# Altium PCB ESP32_With_USB-C_Port_AL.PcbDoc (part 1 of 2)
Units mil, origin at the board's own origin, x right, y up, seen from the top; angles counter-clockwise.
Board outline 2700 x 1000 mil, 4 copper layers (L1, L2, L3, L4), stack 61.583 mil thick; 64 components, 73 nets, 299 pads, 163 vias.
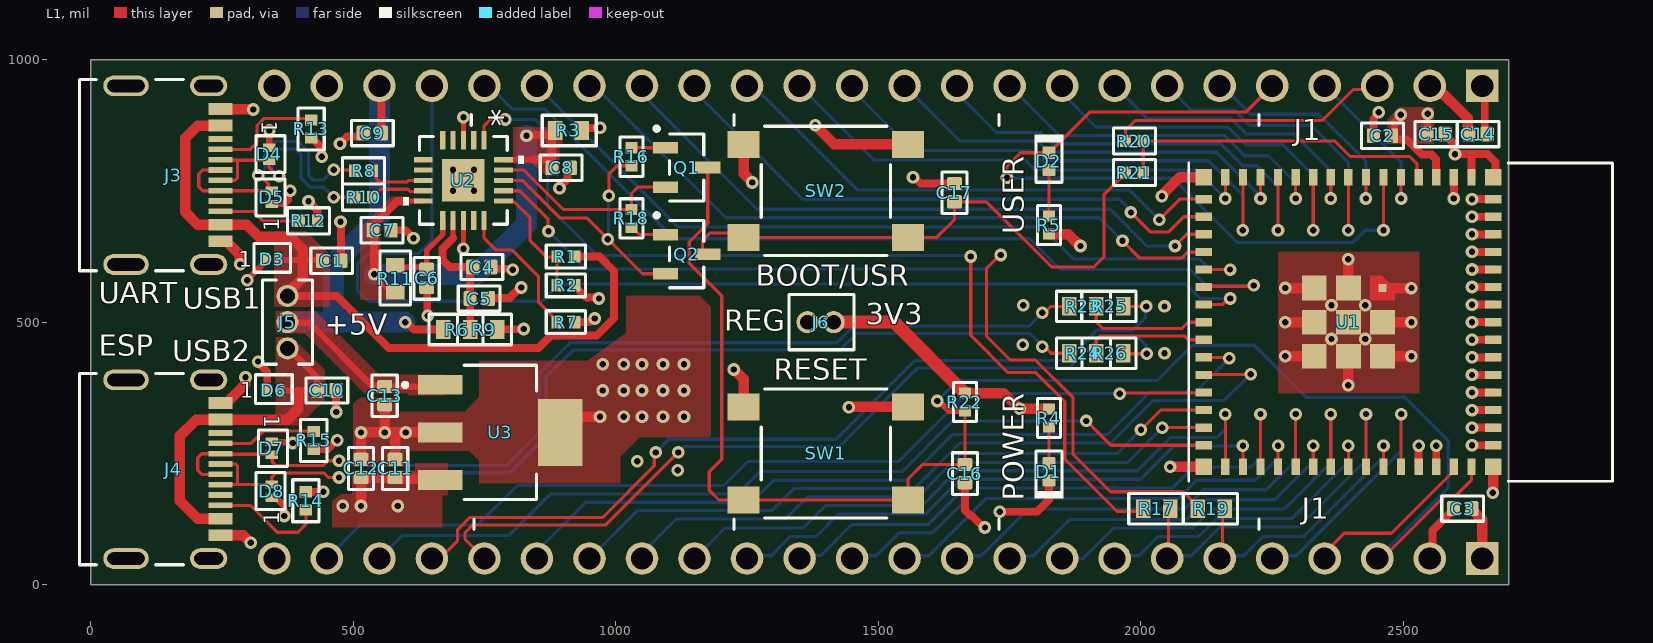
[diagram p0: L1 view]
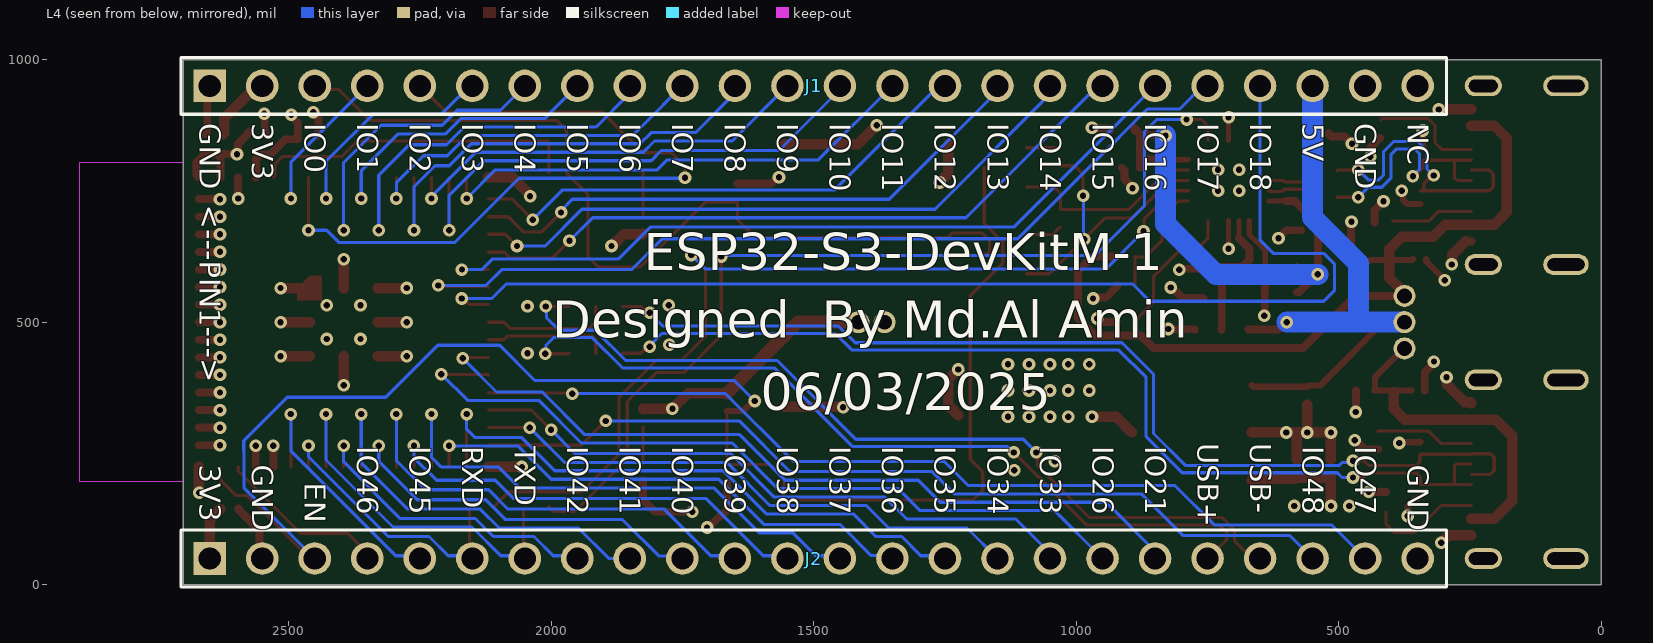
[diagram p1: L4 view, seen from below]
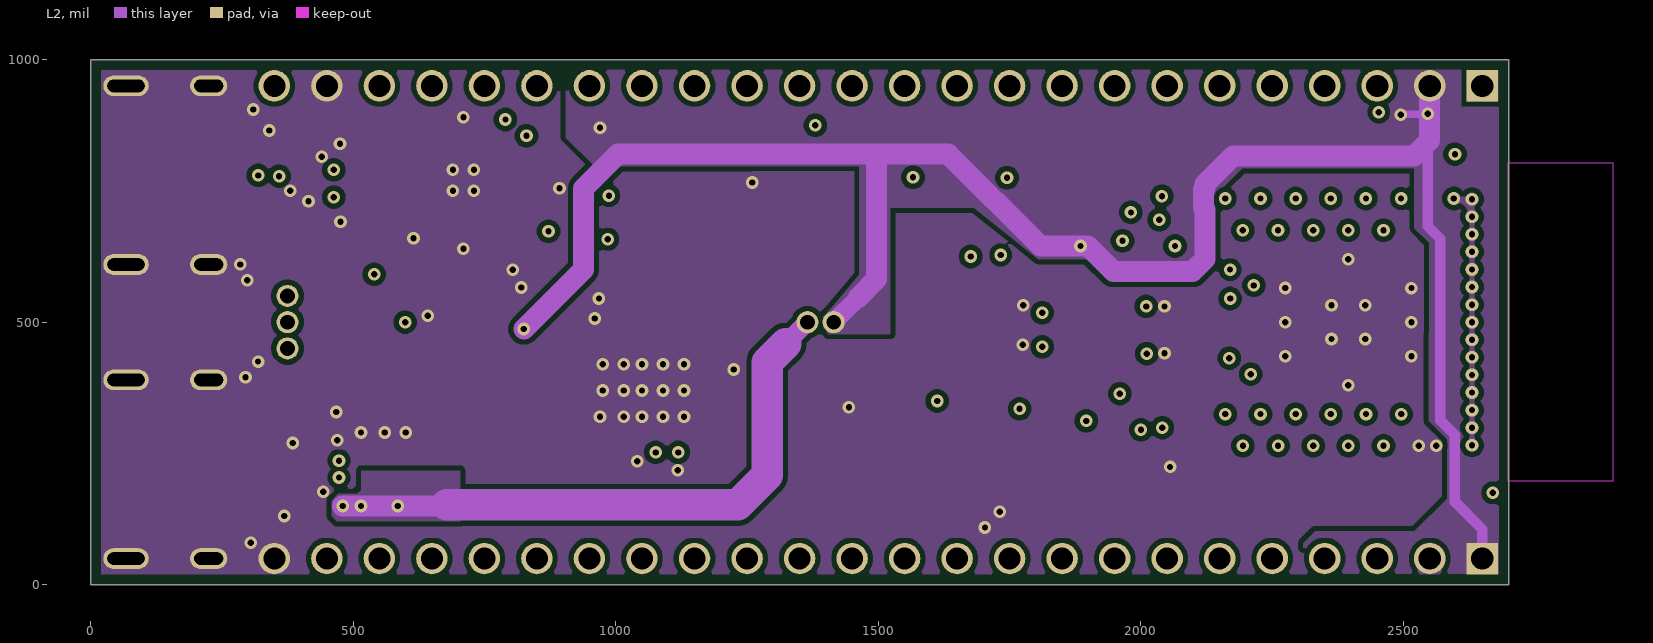
[diagram p2: L2]
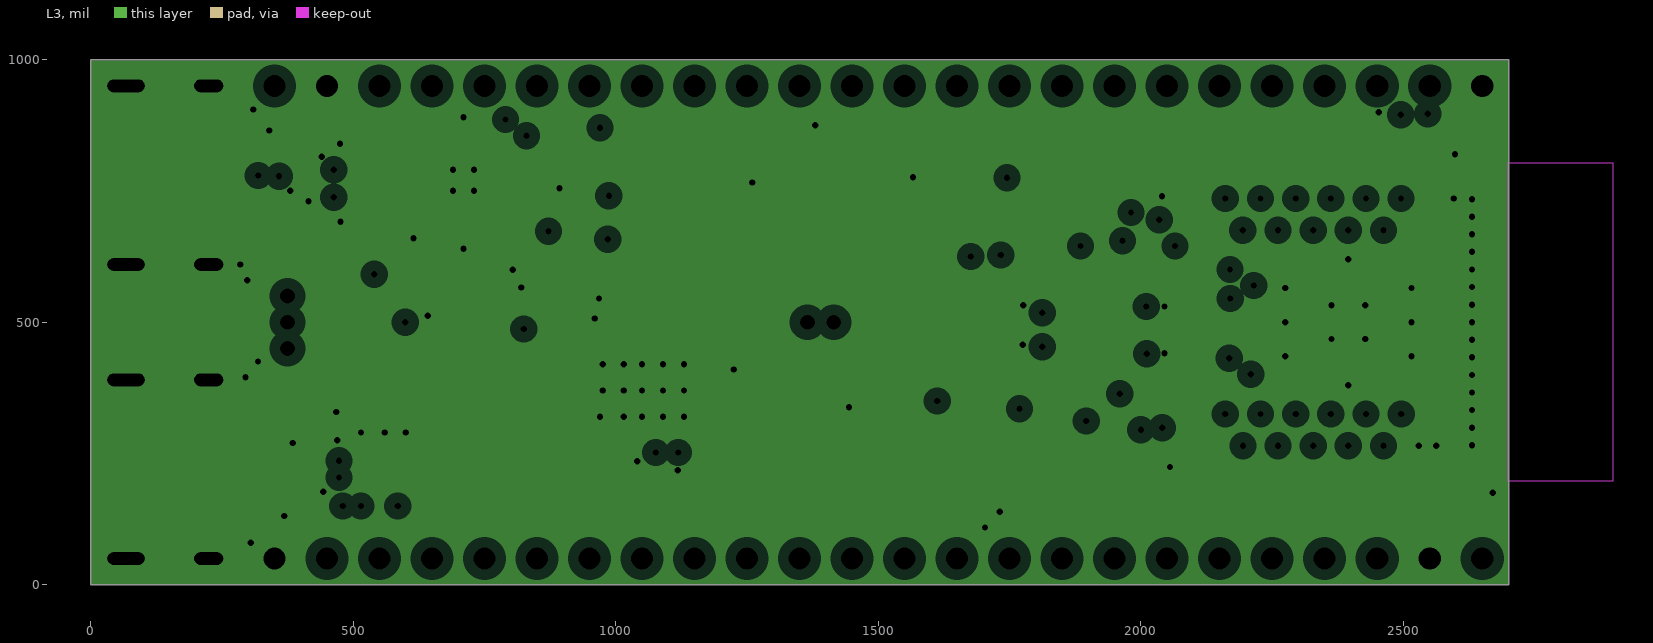
[diagram p3: L3, clearances drawn from the general rule]
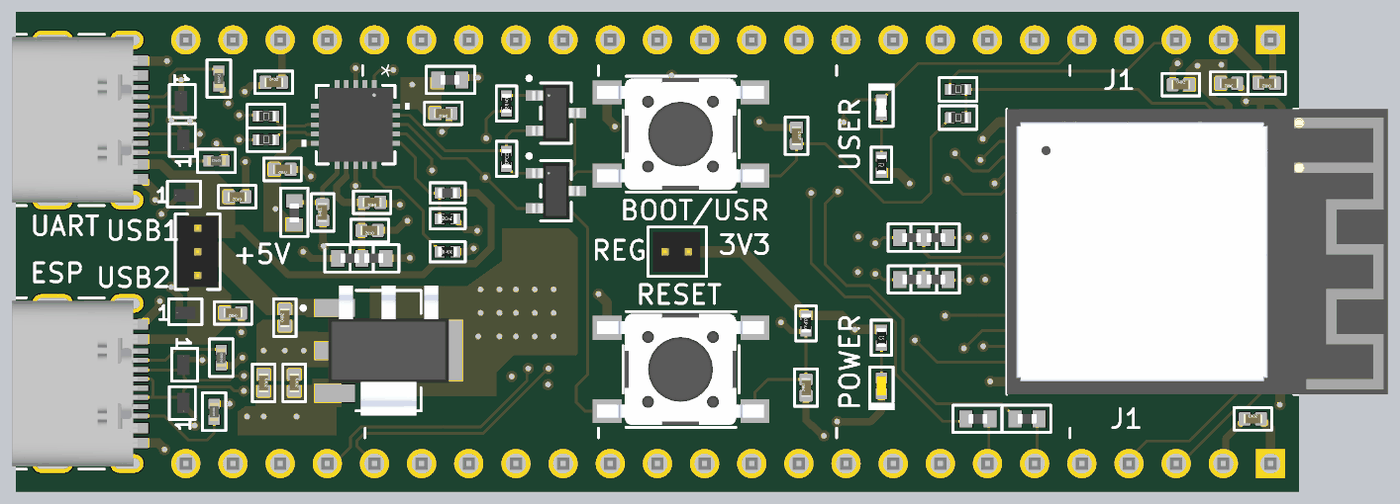
[diagram p4: 3D render of the assembled board from above, using the file's embedded part models]

## Layer stack, top to bottom
Top Solder: solder mask 0.4, Solder Resist, Dk 3.5
L1: signal copper 1.378
Dielectric 2: prepreg 3.9134, PP-006, Dk 4.1
L2: signal copper 0.5984
Dielectric 1: dielectric 49.8031, FR-4, Dk 4.8
L3: plane copper 0.5984, net GND
Dielectric 3: prepreg 3.9134, PP-006, Dk 4.1
L4: signal copper 1.378
Bottom Solder: solder mask 0.4, Solder Resist, Dk 3.5

## Board outline
0,0 2700,0 2700,1000 0,1000

## Design rules (kind name [scope] priority, off if disabled: settings)
Clearance Smaller [(Layer = 'L2')] p1: gap=10 ignorepadtopadclearanceinfootprint=FALSE
Clearance [All] p2: gap=6 ignorepadtopadclearanceinfootprint=FALSE
Clearance "DIFF90 Clearance" [InDifferentialPairClass('DIFF90')] p3: gap=8 ignorepadtopadclearanceinfootprint=FALSE
DiffPairsRouting DIFF90 [InDifferentialPairClass('DIFF90')] p1: maxlimit=8.1 minlimit=8 mostfreqgap=8 toplayer_minwidth=6.03 toplayer_maxwidth=6.23 toplayer_prefwidth=6.03 midlayer1_minwidth=5.1 midlayer1_maxwidth=5.2 midlayer1_prefwidth=5.1 bottomlayer_minwidth=6.03 bottomlayer_maxwidth=6.23 bottomlayer_prefwidth=6.03 maxuncoupledlength=500
MinimumSolderMaskSliver [All] p1: minsoldermaskwidth=3.15
PlaneClearance [All] p1: clearance=20
PlaneConnect [All] p1: pad.planeconnectstyle=Relief pad.reliefexpansion=20 pad.reliefentries=4 pad.reliefconductorwidth=20 pad.reliefairgap=10 via.planeconnectstyle=Direct via.reliefexpansion=20 via.reliefentries=4 via.reliefconductorwidth=10 via.reliefairgap=10
PolygonConnect [All] p1: connectstyle=Direct reliefconductorwidth=10 reliefentries=4 polygonreliefangle="90 Angle" airgapwidth=10
RoutingVias [All] p1: holewidth=12 width=24 viastyle="Through Hole" minholewidth=12 minwidth=24 maxholewidth=12 maxwidth=24
SilkToSolderMaskClearance [IsPad] p1: minsilkscreentomaskgap=6 clearancetoexposedcopper=TRUE
SolderMaskExpansion [All] p1: expansion=2 istentingtop=FALSE
SupplyNets "Schematic Supply Nets_5" [InNet('GND')] p1: voltage=0.000
SupplyNets "Schematic Supply Nets_4" [InNet('+3V3_REG')] p2: voltage=0.000
SupplyNets "Schematic Supply Nets_3" [InNet('+5V_VBUS2')] p3: voltage=0.000
SupplyNets "Schematic Supply Nets_2" [InNet('+5V')] p4: voltage=0.000
SupplyNets "Schematic Supply Nets_1" [InNet('+3V3')] p5: voltage=0.000
SupplyNets "Schematic Supply Nets" [InNet('+5V_VBUS1')] p6: voltage=0.000
Width [All] p1: maxlimit=100 minlimit=6 preferedwidth=10 minimp=50.000000 maximp=50.000000 favimp=50.000000
25 further rules are at their usual default settings.

## Classes and differential pairs
differential pair class DIFF90: CON1_USB CON2_USB CON_ESP_USB ESP_USB FTDI_USB
differential pair FTDI_USB: +FTDI_USB_P -FTDI_USB_N
differential pair ESP_USB: +ESP_USB_P -ESP_USB_N
differential pair CON_ESP_USB: +CON_ESP_USB_P -CON_ESP_USB_N
differential pair CON2_USB: +CON2_USB_P -CON2_USB_N
differential pair CON1_USB: +CON1_USB_P -CON1_USB_N

## Components (designator, comment, footprint, x,y, rotation, side; value= is the part's Value field where it differs from the comment)
C1 "100nF , 50V" CAPC1005X70N_ALL 459,617 r180 top value=100nF
C2 "100nF , 50V" CAPC1005X70N_ALL 2460,855 r0 top value=100nF
C3 "100nF , 50V" CAPC1005X70N_ALL 2612.68,145 r0 top value=100nF
C4 "100nF , 50V" CAPC1005X70N_ALL 745,605 r180 top value=100nF
C5 "4u7, 16V" CAPC1005X70N_ALL 740,545 r180 top value=4.7uF
C6 "100nF , 50V" CAPC1005X70N_ALL 640,583.5 r90 top value=100nF
C7 "100nF , 50V" CAPC1005X70N_ALL 555,675 r180 top value=100nF
C8 "100nF , 50V" CAPC1005X70N_ALL 896,794 r180 top value=100nF
C9 "100nF , 50V" CAPC1005X70N_ALL 536.5,860 r0 top value=100nF
C10 "100nF , 50V" CAPC1005X70N_ALL 450,370 r180 top value=100nF
C11 "10uF, 10V" CAPC1005X70N_ALL 580,221.5 r270 top value=10uF
C12 "10uF, 10V" CAPC1005X70N_ALL 515,221.5 r270 top value=10uF
C13 "4u7, 16V" CAPC1005X70N_ALL 560,360 r90 top value=4.7uF
C14 "10uF, 10V" CAPC1005X70N_ALL 2642,858 r180 top value=10uF
C15 "100nF , 50V" CAPC1005X70N_ALL 2562,858 r180 top value=100nF
C16 "1uF, 35V" CAPC1005X70N_ALL 1665,211.5 r90 top value=10uF
C17 "100nF , 50V" CAPC1005X70N_ALL 1645,746.5 r270 top value=100nF
D1 "LED_YLW-GRN" LED_0402_YLW_GR 1825,215 r90 top
D2 "RED_LED" "LED_0402_RED_01- DUPLICATE" 1825,806.34 r270 top
D3 "AQ3045-01ETG" RTVS_SOD882_LTF-M 346,620 r0 top
D4 "AQ3045-01ETG" RTVS_SOD882_LTF-M 340,820 r270 top
D5 "AQ3045-01ETG" RTVS_SOD882_LTF-M 345,737.5 r90 top
D6 "AQ3045-01ETG" RTVS_SOD882_LTF-M 349,370 r0 top
D7 "AQ3045-01ETG" RTVS_SOD882_LTF-M 345,260 r270 top
D8 "AQ3045-01ETG" RTVS_SOD882_LTF-M 345,178.5 r90 top
J1 "22-28-4245" CONN_SD-42375-001_M295_24_MOL 2650,950 r0 bottom locked
J2 "22-28-4245" CONN_SD-42375-001_M295_24_MOL 2650,50 r0 bottom locked
J3 "217179-0001" MOLEX_2171790001 112.8,779.92 r270 top locked
J4 "217179-0001" MOLEX_2171790001 112.8,220.08 r270 top locked
J5 "FTS-103-01-F-S" CONN_FTS-103-01-x-S_SAI 375,550 r90 top locked
J6 "FTS-102-01-F-S" CONN_FTS-102-01-x-S_SAI 1365,500 r180 top
Q1 "SS8050-G" TRAN_SS8050-G_CIP 1135,794.5 r270 top
Q2 "SS8050-G" TRAN_SS8050-G_CIP 1135,629.5 r270 top
R1 "4K7" RESC1005X40N 905,625 r0 top value=4.7kR
R2 "10K" RESC1005X37N_10k 905,570 r180 top value=10kR
R3 "0R" RESC1005X40_0 910,865 r0 top value=0mR
R4 "1K" RESC1005X40N_1k 1825,317.5 r90 top value=1kR
R5 "1K" RESC1005X40N_1k 1825,685 r270 top value=1kR
R6 "0R" RESC1005X40_0 697.59,486 r180 top value=0mR
R7 "10K" RESC1005X37N_10k 905,500 r0 top value=10kR
R8 "27R" RESC1005X40N_27 520,788 r0 top
R9 "0R" RESC1005X40_0 748.77,486 r0 top value=0mR
R10 "27R" RESC1005X40N_27 520,738 r0 top
R11 "0R" RESC1005X40_0 580,582.5 r90 top value=0mR
R12 "5K1" RESC1005X37N_5.1 415,693 r180 top value=5.1kR
R13 "5K1" RESC1005X37N_5.1 420,867.99 r90 top value=5.1kR
R14 "5K1" RESC1005X37N_5.1 410,160 r270 top value=5.1kR
R15 "5K1" RESC1005X37N_5.1 425,275 r90 top value=5.1kR
R16 "10K" RESC1005X37N_10k 1030,815 r270 top value=10kR
R17 "0R" RESC1005X40_0 2030,145 r180 top value=0mR
R18 "10K" RESC1005X37N_10k 1030,697.5 r90 top value=10kR
R19 "0R" RESC1005X40_0 2134,145 r180 top value=0mR
R20 "27R" RESC1005X40N_27 1987.5,845 r0 top
R21 "27R" RESC1005X40N_27 1987.5,785 r0 top
R22 "10K" RESC1005X37N_10k 1665,348 r90 top value=10kR
R23 "0R" RESC1005X40_0 1889.23,530 r0 top value=0mR
R24 "0R" RESC1005X40_0 1889.41,441 r0 top value=0mR
R25 "0R" RESC1005X40_0 1940.41,530 r180 top value=0mR
R26 "0R" RESC1005X40_0 1940.59,441 r180 top value=0mR
SW1 "PTS645SH50SMTR92LFS" PTS645S_SMTR92_CNK 1400,250 r180 top locked
SW2 "PTS645SH50SMTR92LFS" PTS645S_SMTR92_CNK 1400,750 r180 top locked
U1 "ESP32-S3-MINI-1-N8" XCVR_ESP32-S3-MINI-1-N8 2395.04,500 r270 top locked
U2 "FT231XQ-R" QFN20_FT231XQ_FTD-M 710,770 r270 top locked
U3 "TL1963A-33DCYR" VREG_TL1963A-33DCYR 780,290 r0 top locked

## Footprints (in the part's own frame and the unit in brackets; to place one, negate y for a bottom-side part, rotate by r counter-clockwise, add the part's x,y. Pads: shape width x height; smd on the part's side, far side on the other; paste and mask are expansions set on the pad)
CAPC1005X70N_ALL [mm]
  rrect25% 0.64x0.72 smd: 1(-0.44,0) 2(0.44,0)
  silkscreen extent -1.01,-0.61 1.01,0.61, body extent -0.51,-0.25 0.51,0.25, height 0.65
CONN_FTS-102-01-x-S_SAI [mil]
  round 42 hole 28 paste-99999 mask+0: 1(0,0) 2(-50,0)
  silkscreen extent -89,-53 35,53, body extent -76,-43 24,42, height 154
CONN_FTS-103-01-x-S_SAI [mil]
  round 42 hole 28 paste-99999 mask+0: 1(0,0) 2(-50,0) 3(-100,0)
  silkscreen extent -130,-48 30,48, body extent -125,-43 25,42, height 154
CONN_SD-42375-001_M295_24_MOL [mil]
  rect 62x62 / inner rect 60x60 / far side rect 62x62 hole 42 paste-99999 mask+0: 1(0,0)
  round 62 / inner round 60 / far side round 62 hole 42 paste-99999 mask+0: 2(-100,0) 3(-200,0) 4(-300,0) 5(-400,0) 6(-500,0) 7(-600,0) 8(-700,0) 9(-800,0) 10(-900,0) 11(-1000,0) 12(-1100,0) 13(-1200,0) 14(-1300,0) 15(-1400,0) 16(-1500,0) 17(-1600,0) 18(-1700,0) 19(-1800,0) 20(-1900,0) 21(-2000,0) 22(-2100,0) 23(-2200,0) 24(-2300,0)
  silkscreen extent -2355,-54 55,54, body extent -2350,-49 50,49, height 385
"LED_0402_RED_01- DUPLICATE" [mm]
  rrect15% 0.59x0.61 smd: 1(-0.415,0) 2(0.415,0)
  silkscreen extent -1.3,-0.71 1.02,0.71, body extent -0.5,-0.25 0.5,0.25, height 0.35
LED_0402_YLW_GR [mm]
  rrect15% 0.59x0.61 smd: 1(-0.415,0) 2(0.415,0)
  silkscreen extent -1.3,-0.71 1.02,0.71, body extent -0.5,-0.25 0.5,0.25, height 0.32
MOLEX_2171790001 [mm]
  rect 0.565x1.15 smd mask+0.064: A1B12(-3.2,3.425) A4B9(-2.4,3.425) B1A12(3.2,3.425) B4A9(2.4,3.425)
  rect 0.273x1.15 smd mask+0.064: A5(-1.25,3.425) A6(-0.25,3.425) A7(0.25,3.425) A8(1.25,3.425) B5(1.75,3.425) B6(0.75,3.425) B7(-0.75,3.425) B8(-1.75,3.425)
  oval 1x1.8 hole 0.6 slot 1.4 at 90 deg mask+0.064: S1(-4.32,2.85) S2(4.32,2.85)
  oval 1x2.2 hole 0.6 slot 1.8 at 90 deg mask+0.064: S3(-4.32,-1.15) S4(4.32,-1.15)
  silkscreen extent -4.62,-3.4 4.62,1.63, body extent -4.47,-3.32 4.47,3.43, height 3.26
PTS645S_SMTR92_CNK [mil]
  rect 61x51 smd paste+0 mask+0: 1(-156.5,88.58) 2(156.5,88.58) 3(-156.5,-88.58) 4(156.5,-88.58)
  silkscreen extent -123,-123 123,123, body extent -176,-118 178,118, height 197
QFN20_FT231XQ_FTD-M [mil]
  rect 36x10 smd paste+0 mask+0: 1(-76.5,39.37) 2(-76.5,19.68) 3(-76.5,0) 4(-76.5,-19.68) 5(-76.5,-39.37) 11(76.5,-39.37) 12(76.5,-19.68) 13(76.5,0) 14(76.5,19.68) 15(76.5,39.37)
  rect 10x36 smd paste+0 mask+0: 6(-39.37,-76.5) 7(-19.68,-76.5) 8(0,-76.5) 9(19.68,-76.5) 10(39.37,-76.5) 16(39.37,76.5) 17(19.68,76.5) 18(0,76.5) 19(-19.68,76.5) 20(-39.37,76.5)
  rect 81x81 smd paste+0 mask+0: 21(0,0)
  silkscreen extent -84,-114 84,114, body extent -79,-79 79,79, height 32
RESC1005X37N_5.1 [mm]
  rect 0.54x0.6 smd: 1(-0.432,0) 2(0.432,0)
  silkscreen extent -1.02,-0.64 1.02,0.64, body extent -0.5,-0.25 0.5,0.25, height 0.33
RESC1005X37N_10k [mm]
  rect 0.54x0.6 smd: 1(-0.432,0) 2(0.432,0)
  silkscreen extent -0.95,-0.55 0.95,0.55, body extent -0.51,-0.25 0.51,0.25, height 0.37
RESC1005X40_0 [mm]
  rect 0.7x0.9 smd: 1(-0.65,0) 2(0.65,0)
  silkscreen extent -1.27,-0.74 1.35,0.74, body extent -0.5,-0.25 0.5,0.25, height 0.4
RESC1005X40N [mm]
  rect 0.54x0.6 smd: 1(-0.43,0) 2(0.43,0)
  silkscreen extent -0.95,-0.55 0.95,0.55, body extent -0.5,-0.25 0.5,0.25, height 0.4
RESC1005X40N_1k [mm]
  rect 0.54x0.6 smd: 1(-0.43,0) 2(0.43,0)
  silkscreen extent -0.95,-0.55 0.95,0.55, body extent -0.51,-0.25 0.51,0.25, height 0.37
RESC1005X40N_27 [mm]
  rect 0.54x0.6 smd: 1(-0.432,0) 2(0.432,0)
  silkscreen extent -1.02,-0.64 1.02,0.64, body extent -0.53,-0.28 0.53,0.28, height 0.35
RTVS_SOD882_LTF-M [mil]
  rect 16x24 smd paste+0 mask+0: 1(-12.5,0) 2(12.5,0)
  silkscreen extent -35,-25 35,30, body extent -21,-13 21,13, height 22
TRAN_SS8050-G_CIP [mil]
  rect 22x48 smd paste+0 mask+0: 1(-37.4,-40.2) 2(37.4,-40.2) 3(0,40.2)
  silkscreen extent -78,-61 64,33, body extent -59,-50 59,50, height 41
VREG_TL1963A-33DCYR [mm]
  rect 2.15x0.95 smd: 1(-2.9,2.3) 2(-2.9,0) 3(-2.9,-2.3)
  rect 2.15x3.25 smd: 4(2.9,0)
  silkscreen extent -4.7,-3.25 1.75,3.25, body extent -3.5,-3.25 3.5,3.25, height 1.8
XCVR_ESP32-S3-MINI-1-N8 [mm]
  rect 0.8x0.4 smd: 1(-7,5.95) 2(-7,5.1) 3(-7,4.25) 4(-7,3.4) 5(-7,2.55) 6(-7,1.7) 7(-7,0.85) 8(-7,0) 9(-7,-0.85) 10(-7,-1.7) 11(-7,-2.55) 12(-7,-3.4) 13(-7,-4.25) 14(-7,-5.1) 15(-7,-5.95) 31(7,-5.95) 32(7,-5.1) 33(7,-4.25) 34(7,-3.4) 35(7,-2.55) 36(7,-1.7) 37(7,-0.85) 38(7,0) 39(7,0.85) 40(7,1.7) 41(7,2.55) 42(7,3.4) 43(7,4.25) 44(7,5.1) 45(7,5.95)
  rect 0.4x0.8 smd: 16(-5.95,-7) 17(-5.1,-7) 18(-4.25,-7) 19(-3.4,-7) 20(-2.55,-7) 21(-1.7,-7) 22(-0.85,-7) 23(0,-7) 24(0.85,-7) 25(1.7,-7) 26(2.55,-7) 27(3.4,-7) 28(4.25,-7) 29(5.1,-7) 30(5.95,-7) 46(5.95,7) 47(5.1,7) 48(4.25,7) 49(3.4,7) 50(2.55,7) 51(1.7,7) 52(0.85,7) 53(0,7) 54(-0.85,7) 55(-1.7,7) 56(-2.55,7) 57(-3.4,7) 58(-4.25,7) 59(-5.1,7) 60(-5.95,7)
  rect 1.2x1.2 smd: 61(0,0) 67(0,1.65) 68(1.65,1.65) 69(-1.65,0) 70(1.65,0) 71(-1.65,-1.65) 72(0,-1.65) 73(1.65,-1.65)
  rect 0.8x0.8 smd: 62(-7,7) 63(-7,-7) 64(7,-7) 65(7,7)
  rect 0.4x0.4 smd paste-1 mask+0: 66(-1.65,1.65)
  L1 region: -1.05,1.05 -2.25,1.05 -2.25,1.65 -1.65,2.25 -1.05,2.25
  Keep-Out Layer region: 7.7,7.725 -7.7,7.725 -7.7,12.775 7.7,12.775
  Keep-Out Layer region: 7.7,7.725 -7.7,7.725 -7.7,12.775 7.7,12.775
  silkscreen extent -7.7,-7.73 7.7,12.78, body extent -7.7,-7.71 7.7,12.79, height 2.55

## Part data
C1 C2 C3 C4 C6 C7 C8 C9 C10 C15 C17: library part CL05B104KB54PNC, "CAP CER 0.1UF 50V X7R 0402", Case/Package=343Case, LCSC Part Number=C307331, Manufacturer=Samsung, Max Operating Temperature=125°C, Min Operating Temperature=-55°C, Supplier Part Number=1276-CL05B104KB54PNCDKR-ND, Tolerance=10%, Voltage Rating=50V, Category="Ceramic Capacitors", Height=550um, Manufacturer Part Number=CL05B104KB54PNC, Material=4241ConductorMaterial, Pricing="1=0.1, 10=0.037, 100=0.0211, 1000=0.01333, 2500=0.01141, 5000=0.01026 (USD)", RoHS=Yes, RoHS Compliant=Yes, Stock=1836220, Supplier=Digikey
C5 C13: library part CL05A475MO5NUNC, "CAP CER 4.7UF 16V X5R 0402", Case Code (Imperial)=0402, Case Code (Metric)=1005, LCSC Part Number=C318563, Manufacturer=Samsung, Max Operating Temperature=85°C, Min Operating Temperature=-55°C, Supplier Part Number=1276-6836-1-ND, Tolerance=20%, Voltage Rating=16V, Case/Package=0402, Category="Ceramic Capacitors", ComponentLink1Description=http://www.farnell.com/datasheets/2710653.pdf?src-supplier=Farnell, ComponentLink1URL=http://www.farnell.com/datasheets/2710653.pdf?src-supplier=Farnell, ComponentLink2Description=http://www.samsungsem.com/kr/support/product-search/mlcc/CL05A475MO5NUNC.jsp?src-supplier=Digikey, ComponentLink2URL=http://www.samsungsem.com/kr/support/product-search/mlcc/CL05A475MO5NUNC.jsp?src-supplier=Digikey, ComponentLink3Description=http://www.farnell.com/datasheets/2710653.pdf?src-supplier=Element14, ComponentLink3URL=http://www.farnell.com/datasheets/2710653.pdf?src-supplier=Element14, ComponentLink4Description=https://datasheet.octopart.com/CL05A475MO5NUNC-Samsung-Electro-Mechanics-datasheet-123102911.pdf?src-supplier=Future+Electronics, ComponentLink4URL=https://datasheet.octopart.com/CL05A475MO5NUNC-Samsung-Electro-Mechanics-datasheet-123102911.pdf?src-supplier=Future+Electronics, ComponentLink5Description=http://www.farnell.com/datasheets/2710653.pdf?src-supplier=Newark, ComponentLink5URL=http://www.farnell.com/datasheets/2710653.pdf?src-supplier=Newark, Height=550um, Length=0.039inch, Manufacturer Part Number=CL05A475MO5NUNC, Mounting Technology="Surface Mount", Packaging="Cut Tape", Pricing="1=0.19, 10=0.114, 100=0.0851 (USD)", RoHS=Yes, RoHS Compliant=Yes, Series=CL, Stock=102750, Supplier=Digikey, Thickness=0.022inch, Voltage Rating (DC)=16V, Width=0.02inch
C11 C12 C14: library part CL05A106MP8NUB8, "CAP CER 10UF 10V X5R 0402", Case Code (Imperial)=0402, Case Code (Metric)=1005, LCSC Part Number=C307415, Manufacturer=Samsung, Max Operating Temperature=85°C, Min Operating Temperature=-55°C, Supplier Part Number=1276-6830-6-ND, Tolerance=20%, Voltage Rating=10V, Case/Package=0402, Category="Ceramic Capacitors", ComponentLink1Description=http://www.samsungsem.com/kr/support/product-search/mlcc/CL05A106MP8NUB8.jsp?src-supplier=Digikey, ComponentLink1URL=http://www.samsungsem.com/kr/support/product-search/mlcc/CL05A106MP8NUB8.jsp?src-supplier=Digikey, ComponentLink2Description=https://datasheet.octopart.com/CL05A106MP8NUB8-Samsung-Electro-Mechanics-datasheet-136460857.pdf?src-supplier=Future+Electronics, ComponentLink2URL=https://datasheet.octopart.com/CL05A106MP8NUB8-Samsung-Electro-Mechanics-datasheet-136460857.pdf?src-supplier=Future+Electronics, Height=550um, Length=0.039inch, Manufacturer Part Number=CL05A106MP8NUB8, Material=4241ConductorMaterial, Mounting Technology="Surface Mount", Packaging="Cut Tape", Pricing="1=0.2, 10=0.12, 100=0.0808, 1000=0.06854 (USD)", RoHS=Yes, RoHS Compliant=Yes, Series=CL, Stock=116604, Supplier=Digikey, Thickness=0.035inch, Width=0.02inch
C16: library part "CL05A106MP8NUB8 (2)", "CAP CER 1UF 35V X5R 0402", Case Code (Imperial)=0402, Case Code (Metric)=1005, LCSC Part Number=C307413, Manufacturer=Samsung, Manufacturer Part Number=CL05A106MP8NUB8, Max Operating Temperature=85°C, Min Operating Temperature=-55°C, Supplier Part Number=1276-6830-1-ND, Tolerance=20%, Voltage Rating=10V, Case/Package=0402, Category="Ceramic Capacitors", ComponentLink1Description=http://www.samsungsem.com/kr/support/product-search/mlcc/CL05A106MP8NUB8.jsp?src-supplier=Digikey, ComponentLink1URL=http://www.samsungsem.com/kr/support/product-search/mlcc/CL05A106MP8NUB8.jsp?src-supplier=Digikey, ComponentLink2Description=https://datasheet.octopart.com/CL05A106MP8NUB8-Samsung-Electro-Mechanics-datasheet-136460857.pdf?src-supplier=Future+Electronics, ComponentLink2URL=https://datasheet.octopart.com/CL05A106MP8NUB8-Samsung-Electro-Mechanics-datasheet-136460857.pdf?src-supplier=Future+Electronics, Height=550um, Length=0.039inch, Material=4241ConductorMaterial, Mounting Technology="Surface Mount", Packaging="Cut Tape", Pricing="1=0.2, 10=0.12, 100=0.0808, 1000=0.06854 (USD)", RoHS=Yes, RoHS Compliant=Yes, Series=CL, Stock=116604, Supplier=Digikey, Thickness=0.035inch, Width=0.02inch
D1: library part VLMG1500-GS08, "LED YLW-GRN 0402 SMD", Case Code (Imperial)=0402, Case Code (Metric)=1005, Color=Green,Yellow, Forward Current=30mA, Forward Voltage=2V, Illumination Color=Green, LCSC Part Number=C511404, Lens Color=Clear, Manufacturer=Vishay, Max Operating Temperature=85°C, Min Operating Temperature=-30°C, Package Quantity=1, Power Dissipation=75mW, Reverse Voltage=5V, Supplier Part Number=VLMG1500-GS08CT-ND, Test Current=20mA, Case/Package=0402, Category=LEDs, ComponentLink1Description=https://datasheet.ciiva.com/12071/vlmo1500-244705-12071911.pdf?src-supplier=Mouser, ComponentLink1URL=https://datasheet.ciiva.com/12071/vlmo1500-244705-12071911.pdf?src-supplier=Mouser, ComponentLink2Description=https://datasheet.ciiva.com/30005/vlmo1500-30005134.pdf?src-supplier=Avnet, ComponentLink2URL=https://datasheet.ciiva.com/30005/vlmo1500-30005134.pdf?src-supplier=Avnet, Depth=0.5mm, Dominant Wavelength=571nm, Height=0.35mm, Lead Free="Lead Free", Length=1mm, Lens Style=Rectangular, Luminous Intensity=35mcd, Manufacturer Part Number=VLMG1500-GS08, Mounting Technology="Surface Mount", Number of Elements=1, Number of LEDs=1, Packaging="Tape and Reel", Pins=2, Power Rating=75mW, Pricing="1=0.24, 10=0.164, 100=0.1147, 500=0.09218, 1000=0.0847 (USD)", Radiation Hardening=No, Reach SVHC Compliant=Unknown, RoHS=Yes, RoHS Compliant=Yes, Series=CHipLED, Stock=150454, Supplier=Digikey, Viewing Angle=130°, Wavelength=571nm, Width=0.5mm
D2: library part VLMS1500-GS08, "LED RED 0402 SMD", Case Code (Imperial)=0402, Case Code (Metric)=1005, Color=Red, Forward Current=30mA, Forward Voltage=2V, LCSC Part Number=C511370, Manufacturer=Vishay, Max Operating Temperature=85°C, Min Operating Temperature=-30°C, Package Quantity=9000, Power Rating=75mW, Supplier Part Number=VLMS1500-GS08CT-ND, Test Current=20mA, Case/Package=0402, Category=LEDs, ComponentLink1Description=http://components.arrow.com/part/dataview/56357384S461524N5680?src-supplier=Arrow+Electronics, ComponentLink1URL=http://components.arrow.com/part/dataview/56357384S461524N5680?src-supplier=Arrow+Electronics, ComponentLink2Description=http://www.mouser.com/ds/2/427/vlmo1500-244705.pdf?src-supplier=Mouser, ComponentLink2URL=http://www.mouser.com/ds/2/427/vlmo1500-244705.pdf?src-supplier=Mouser, ComponentLink3Description=http://www.farnell.com/datasheets/1809983.pdf?src-supplier=Farnell, ComponentLink3URL=http://www.farnell.com/datasheets/1809983.pdf?src-supplier=Farnell, ComponentLink4Description=http://www.alliedelec.com/m/d/cfc385e1097fc985ee9a50a3551ac188.pdf?src-supplier=Allied+Electronics, ComponentLink4URL=http://www.alliedelec.com/m/d/cfc385e1097fc985ee9a50a3551ac188.pdf?src-supplier=Allied+Electronics, ComponentLink5Description=https://datasheet.octopart.com/VLMS1500-GS08-Vishay-datasheet-62332426.pdf?src-supplier=Newark, ComponentLink5URL=https://datasheet.octopart.com/VLMS1500-GS08-Vishay-datasheet-62332426.pdf?src-supplier=Newark, ComponentLink6Description=http://www.vishay.com/docs/82554/vlmo1500.pdf?src-supplier=Avnet, ComponentLink6URL=http://www.vishay.com/docs/82554/vlmo1500.pdf?src-supplier=Avnet, ComponentLink7Description=https://datasheet.octopart.com/VLMS1500-GS08-Vishay-datasheet-21227148.pdf?src-supplier=Future+Electronics, ComponentLink7URL=https://datasheet.octopart.com/VLMS1500-GS08-Vishay-datasheet-21227148.pdf?src-supplier=Future+Electronics, ComponentLink8Description=http://www.farnell.com/datasheets/2050839.pdf?src-supplier=Newark, ComponentLink8URL=http://www.farnell.com/datasheets/2050839.pdf?src-supplier=Newark, ComponentLink9Description=http://www.farnell.com/datasheets/1809983.pdf?src-supplier=Element14, ComponentLink9URL=http://www.farnell.com/datasheets/1809983.pdf?src-supplier=Element14, ComponentLink10Description=https://datasheet.octopart.com/VLMS1500-GS08-Vishay-datasheet-33014519.pdf?src-supplier=Element14, ComponentLink10URL=https://datasheet.octopart.com/VLMS1500-GS08-Vishay-datasheet-33014519.pdf?src-supplier=Element14, ComponentLink11Description=http://www.farnell.com/datasheets/1809983.pdf?src-supplier=Newark, ComponentLink11URL=http://www.farnell.com/datasheets/1809983.pdf?src-supplier=Newark, ComponentLink12Description=http://datasheet.octopart.com/VLMS1500-GS08-Vishay-datasheet-21227148.pdf?src-supplier=Avnet, ComponentLink12URL=http://datasheet.octopart.com/VLMS1500-GS08-Vishay-datasheet-21227148.pdf?src-supplier=Avnet, ComponentLink13Description=http://datasheet.octopart.com/VLMS1500-GS08-Vishay-datasheet-21227148.pdf?src-supplier=LCSC, ComponentLink13URL=http://datasheet.octopart.com/VLMS1500-GS08-Vishay-datasheet-21227148.pdf?src-supplier=LCSC, ComponentLink14Description=http://datasheet.octopart.com/VLMS1500-GS08-Vishay-datasheet-21227148.pdf?src-supplier=Quest, ComponentLink14URL=http://datasheet.octopart.com/VLMS1500-GS08-Vishay-datasheet-21227148.pdf?src-supplier=Quest, ComponentLink15Description=http://datasheet.octopart.com/VLMS1500-GS08-Vishay-datasheet-21227148.pdf?src-supplier=NAC+Semi, ComponentLink15URL=http://datasheet.octopart.com/VLMS1500-GS08-Vishay-datasheet-21227148.pdf?src-supplier=NAC+Semi, Dominant Wavelength=631nm, Height=0.55mm, Illumination Color=Red, Lead Free="Lead Free", Length=1mm, Lens Size=0.5mm, Lens Style=Flat,Rectangular,Square, Luminous Intensity=54mcd, Manufacturer Part Number=VLMS1500-GS08, Mounting Technology="Surface Mount", Number of LEDs=1, Packaging="Tape and Reel", Pins=2, Pricing="1=0.24, 10=0.164, 100=0.1147, 500=0.09218, 1000=0.0847 (USD)", Radiation Hardening=No, Reach SVHC Compliant=Unknown, RoHS=Yes, RoHS Compliant=Yes, Series=CHipLED, Stock=64500, Supplier=Digikey, Viewing Angle=130°, Wavelength=631nm, Width=0.5mm
D3 D4 D5 D6 D7 D8: "TVS DIODE 5.3VWM 12VC SOD882", LCSC Part Number=C3710326, Leakage Current=100nA, Manufacturer=Littelfuse, Max Operating Temperature=150°C, Min Breakdown Voltage=6.8V, Min Operating Temperature=-55°C, Operating Supply Voltage=5.3V, Peak Pulse Current=3A, Peak Pulse Power=40W, Power Line Protection=No, Supplier Part Number=F9321CT-ND, Category="TVS Diodes", ComponentLink1Description=https://www.littelfuse.com/~/media/electronics/datasheets/tvs_diode_arrays/littelfuse_tvs_diode_array_aq3045_datasheet.pdf.pdf?src-supplier=Digikey, ComponentLink1URL=https://www.littelfuse.com/~/media/electronics/datasheets/tvs_diode_arrays/littelfuse_tvs_diode_array_aq3045_datasheet.pdf.pdf?src-supplier=Digikey, ComponentLink2Description=http://www.littelfuse.com/~/media/electronics/datasheets/tvs_diode_arrays/littelfuse_tvs_diode_array_aq3045_datasheet.pdf.pdf?src-supplier=Digikey, ComponentLink2URL=http://www.littelfuse.com/~/media/electronics/datasheets/tvs_diode_arrays/littelfuse_tvs_diode_array_aq3045_datasheet.pdf.pdf?src-supplier=Digikey, Diode Type=ZENER, Manufacturer Part Number=AQ3045-01ETG, Mounting Technology="Surface Mount", Number of Bidirectional Channels=1, Number of Channels=1NUMBER, Packaging="Cut Tape", Pricing="1=0.46, 10=0.302, 100=0.141, 500=0.1335, 1000=0.1302 (USD)", Reverse Standoff Voltage=5.3V, RoHS=Yes, RoHS Compliant=Yes, Series="Automotive, AEC-Q101, AQ3045, SPA®", Stock=10015, Supplier=Digikey
J1 J2: "CONN HEADER VERT 24POS 2.54MM", Current Rating=4A, Housing Color=Black, LCSC Part Number=C7145888, Manufacturer=Molex, Supplier Part Number=900-0022284245-ND, Category="Headers and Wire Housings", ComponentLink1Description=https://datasheet.ciiva.com/6814/022284363-sd-6814049.pdf?src-supplier=Digikey, ComponentLink1URL=https://datasheet.ciiva.com/6814/022284363-sd-6814049.pdf?src-supplier=Digikey, ComponentLink2Description=https://datasheet.ciiva.com/10075/0022284245-pcb-headers-10075617.pdf?src-supplier=Avnet, ComponentLink2URL=https://datasheet.ciiva.com/10075/0022284245-pcb-headers-10075617.pdf?src-supplier=Avnet, ComponentLink3Description=https://datasheet.ciiva.com/1433/1597854-1433759.pdf?src-supplier=Element14, ComponentLink3URL=https://datasheet.ciiva.com/1433/1597854-1433759.pdf?src-supplier=Element14, Contact Material=Brass, Contact Plating=Gold, Gender=Male, Lead Free="Lead Free", Manufacturer Part Number=22-28-4245, Mounting Technology="Through Hole", Number of Circuits=24, Number of Contacts=24, Number of Positions=24, Number of Rows=1, Orientation=Vertical, Packaging=Bulk, Pitch=2.54mm, Plating=Tin, Pricing="1=1.21, 10=1.024, 100=0.8699, 500=0.77638, 1000=0.73932, 5000=0.65998, 10000=0.62851 (USD)", RoHS=No, Stock=1840, Supplier=Digikey, Termination=Solder
J3 J4: "CONN RCP USB2.0 TYP C 24P SMD RA", Current Rating=1.25A, LCSC Part Number=C3197684, Manufacturer=Molex, Max Operating Temperature=85°C, Min Operating Temperature=-40°C, Supplier Part Number=900-2171790001CT-ND, Voltage Rating=30V, Category=Connectors, Contact Material=Nickel,Gold, Gender=Receptacle, Height=3.36mm, Manufacturer Part Number=217179-0001, Number of Contacts=16, Pricing="1=0.83, 10=0.704, 25=0.6596, 50=0.628, 100=0.598, 250=0.56052, 500=0.53374 (USD)", RoHS=No, Stock=13840, Supplier=Digikey, USB Standard="USB 2.0"
J5: "CONN HEADER VERT 3POS 1.27MM", LCSC Part Number=C3333578, Manufacturer=Samtec, Supplier Part Number=612-FTS-103-01-F-S-ND, Category=Connectors, ComponentLink1Description=http://www.samtec.com/documents/webfiles/pdf/FTS.pdf?src-supplier=Avnet, ComponentLink1URL=http://www.samtec.com/documents/webfiles/pdf/FTS.pdf?src-supplier=Avnet, ComponentLink2Description=http://suddendocs.samtec.com/prints/fts-1xx-xx-xx-xx-xx-mkt.pdf?src-supplier=Digikey, ComponentLink2URL=http://suddendocs.samtec.com/prints/fts-1xx-xx-xx-xx-xx-mkt.pdf?src-supplier=Digikey, ComponentLink3Description=https://datasheet.octopart.com/FTS-103-01-F-S-Samtec-datasheet-116535195.pdf?src-supplier=Toby+Electronics, ComponentLink3URL=https://datasheet.octopart.com/FTS-103-01-F-S-Samtec-datasheet-116535195.pdf?src-supplier=Toby+Electronics, ComponentLink4Description=https://datasheet.octopart.com/FTS-103-01-F-S-Samtec-datasheet-151470456.pdf?src-supplier=Sager+Electronics, ComponentLink4URL=https://datasheet.octopart.com/FTS-103-01-F-S-Samtec-datasheet-151470456.pdf?src-supplier=Sager+Electronics, ComponentLink5Description=https://datasheet.octopart.com/FTS-103-01-F-S-Samtec-datasheet-118493358.pdf?src-supplier=Electro+Sonic, ComponentLink5URL=https://datasheet.octopart.com/FTS-103-01-F-S-Samtec-datasheet-118493358.pdf?src-supplier=Electro+Sonic, Gender=29Gender, Manufacturer Part Number=FTS-103-01-F-S, Pricing="1=0.73, 50=0.6378, 100=0.5407, 500=0.4491, 1000=0.38362, 2000=0.31431, 5000=0.2478, 10000=0.228 (USD)", RoHS=Yes, Stock=1344, Supplier=Digikey
J6: "CONN HEADER VERT 2POS 1.27MM", Flammability Rating="UL94 V-0", Insulation Color=Black, LCSC Part Number=C6045317, Manufacturer=Samtec, Max Operating Temperature=125°C, Min Operating Temperature=-55°C, Supplier Part Number=SAM15176-ND, Category=Connectors, ComponentLink1Description=http://www.samtec.com/documents/webfiles/pdf/FTS.pdf?src-supplier=Avnet, ComponentLink1URL=http://www.samtec.com/documents/webfiles/pdf/FTS.pdf?src-supplier=Avnet, ComponentLink2Description=https://datasheet.octopart.com/FTS-102-01-F-S-Samtec-datasheet-118493358.pdf?src-supplier=Electro+Sonic, ComponentLink2URL=https://datasheet.octopart.com/FTS-102-01-F-S-Samtec-datasheet-118493358.pdf?src-supplier=Electro+Sonic, Contact Finish - Mating=GOLD, Contact Material=Bronze, Contact Plating=Gold, Contact Shape=Square, Contact Type="Male Pin", Fastening Type=Pull, Gender=Male, Insulation Material=Polymer, Manufacturer Part Number=FTS-102-01-F-S, Mounting Technology="Through Hole", Number of Contacts=2, Number of Positions=2, Number of Rows=1, Packaging=Bulk, Pitch=1.27mm, Pricing="1=0.49, 50=0.4252, 100=0.3608, 500=0.2994, 1000=0.25609, 2000=0.252 (USD)", Radiation Hardening=No, RoHS=Yes, RoHS Compliant=Yes, Series=FTS, Stock=165, Supplier=Digikey, Termination=Solder
Q1 Q2: "TRANS NPN 25V 1.5A SOT-23-3", Case/Package=TO-236-3, Collector Base Voltage (VCBO)=40V, Collector Emitter Breakdown Voltage=25V, Collector Emitter Saturation Voltage=500mV, Collector-emitter Voltage-Max=400mV, Emitter Base Voltage (VEBO)=5V, LCSC Part Number=C164886, Manufacturer=Comchip, Max Collector Current=1.5A, Max Operating Temperature=150°C, Max Power Dissipation=300mW, Supplier Part Number=641-1790-1-ND, Transition Frequency=100MHz, Category=Transistors, ComponentLink1Description="http://www.comchiptech.com/admin/files/product/SS8050-G RevA181526.pdf?src-supplier=Digikey", ComponentLink1URL="http://www.comchiptech.com/admin/files/product/SS8050-G RevA181526.pdf?src-supplier=Digikey", Height=1.15mm, hFE Min=200, Manufacturer Part Number=SS8050-G, Max Breakdown Voltage=25V, Mounting Technology="Surface Mount", Number of Elements=1, Packaging="Cut Tape", Power Dissipation=300mW, Pricing="1=0.24, 10=0.148, 100=0.0921, 500=0.06754, 1000=0.05958 (USD)", RoHS=Yes, RoHS Compliant=Yes, Series=-, Stock=126714, Supplier=Digikey
R1: library part RC0402FR-074K7L, "RES 4.7K OHM 1% 1/16W 0402", Case Code (Imperial)=0402, Case Code (Metric)=1005, LCSC Part Number=C105871, Manufacturer=Yageo, Max Operating Temperature=155°C, Max Power Dissipation=63mW, Min Operating Temperature=-55°C, Power Rating=62.5mW, Resistance Tolerance=1%, Resistor Type="Thick Film", Supplier Part Number=311-4.7KLRCT-ND, Temperature Coefficient=100ppm/°C, Voltage Rating=50V, Case/Package=0402, Category="Chip SMD Resistors", ComponentLink1Description=https://datasheet.ciiva.com/22661/1686128-22661342.pdf?src-supplier=Element14, ComponentLink1URL=https://datasheet.ciiva.com/22661/1686128-22661342.pdf?src-supplier=Element14, ComponentLink2Description=https://datasheet.ciiva.com/7850/1018594-7850022.pdf?src-supplier=Element14, ComponentLink2URL=https://datasheet.ciiva.com/7850/1018594-7850022.pdf?src-supplier=Element14, ComponentLink3Description=https://datasheet.ciiva.com/7850/1018594-7850023.pdf?src-supplier=Element14, ComponentLink3URL=https://datasheet.ciiva.com/7850/1018594-7850023.pdf?src-supplier=Element14, Construction=Rectangular, Depth=0.5mm, Features="Moisture Resistant", Lead Free="Lead Free", Length=1mm, Manufacturer Part Number=RC0402FR-074K7L, Military Standard=Not, Number of Terminations=2, Packaging="Tape and Reel", Pins=2, Pricing="1=0.1, 10=0.02, 100=0.009, 1000=0.00474, 2500=0.00381, 5000=0.00328 (USD)", Reach SVHC Compliant=No, RoHS=Yes, RoHS Compliant=Yes, Series=RC, Supplier=Digikey, Termination=SMD/SMT, Tolerance=1%, Voltage Rating (AC)=50V, Voltage Rating (DC)=50V, Width=0.5mm
R2 R7 R16 R18 R22: library part AC0402FR-0710KL, "RES SMD 10K OHM 1% 1/16W 0402", Case Code (Imperial)=0402, Case Code (Metric)=1005, LCSC Part Number=C144807, Manufacturer=Yageo, Max Operating Temperature=155°C, Max Power Dissipation=63mW, Min Operating Temperature=-55°C, Power Rating=62.5mW, Supplier Part Number=YAG3436CT-ND, Temperature Coefficient=100ppm/°C, Tolerance=1%, Voltage Rating=50V, Case/Package=0402, Category="Chip SMD Resistors", ComponentLink1Description=https://datasheet.ciiva.com/12656/pyu-ac-51-rohs-l-2-12656634.pdf?src-supplier=Mouser, ComponentLink1URL=https://datasheet.ciiva.com/12656/pyu-ac-51-rohs-l-2-12656634.pdf?src-supplier=Mouser, Features="Moisture Resistant,Automotive AEC-Q200", Height=0.015inch, Lead Free=5697LeadFree, Length=0.039inch, Manufacturer Part Number=AC0402FR-0710KL, Number of Terminations=2, Packaging="Tape and Reel", Pricing="1=0.1, 10=0.009, 100=0.0082, 1000=0.00612, 2500=0.0051 (USD)", RoHS=Yes, RoHS Compliant=Yes, Series=AC, Stock=1055987, Supplier=Digikey, Termination=SMD/SMT, Width=0.02inch
R3 R6 R9 R11 R17 R19 R23 R24 R25 R26: library part RC0402JR-070RL, "RES 0 OHM JUMPER 1/16W 0402", Case Code (Imperial)=0402, Case Code (Metric)=1005, LCSC Part Number=C60485, Manufacturer=Yageo, Max Operating Temperature=155°C, Max Power Dissipation=63mW, Min Operating Temperature=-55°C, Package Quantity=1, Power Rating=62.5mW, Resistance Tolerance=5%, Resistor Type="Thick Film", Supplier Part Number=311-0.0JRCT-ND, Temperature Coefficient=200ppm/°C, Voltage Rating=50V, Case/Package=0402, Category="Chip SMD Resistors", Construction=Rectangular, Contact Plating=Tin,Matte, Depth=0.5mm, Features="Moisture Resistant", Height=0.016inch, Lead Free=5697LeadFree, Length=1mm, Manufacturer Part Number=RC0402JR-070RL, Military Standard=Not, Number of Terminations=2, Packaging="Tape and Reel", Pricing="1=0.1, 10=0.01, 25=0.0064, 50=0.0054, 100=0.0047, 250=0.00392, 500=0.00346, 1000=0.00304, 5000=0.0023 (USD)", Reach SVHC Compliant=Unknown, RoHS=Yes, RoHS Compliant=Yes, Series=RC, Stock=56253, Supplier=Digikey, Technology="THICK FILM", Termination=SMD/SMT, Tolerance=5%, Width=0.02inch
R4 R5: library part RC0402FR-071KL, "RES 1K OHM 1% 1/16W 0402", Case Code (Imperial)=0402, Case Code (Metric)=1005, LCSC Part Number=C106235, Manufacturer=Yageo, Max Operating Temperature=155°C, Max Power Dissipation=63mW, Min Operating Temperature=-55°C, Power Rating=62.5mW, Resistance Tolerance=1%, Resistor Type="Thick Film", Supplier Part Number=311-1.00KLRCT-ND, Temperature Coefficient=100ppm/°C, Voltage Rating=50V, Case/Package=0402, Category="Chip SMD Resistors", ComponentLink1Description=https://datasheet.ciiva.com/11819/0900766b80c66297-11819477.pdf?src-supplier=Rs, ComponentLink1URL=https://datasheet.ciiva.com/11819/0900766b80c66297-11819477.pdf?src-supplier=Rs, ComponentLink2Description=https://datasheet.ciiva.com/7983/1018594-7983502.pdf?src-supplier=Element14, ComponentLink2URL=https://datasheet.ciiva.com/7983/1018594-7983502.pdf?src-supplier=Element14, ComponentLink3Description=https://datasheet.ciiva.com/22747/1018594-22747513.pdf?src-supplier=Element14, ComponentLink3URL=https://datasheet.ciiva.com/22747/1018594-22747513.pdf?src-supplier=Element14, ComponentLink4Description=https://datasheet.ciiva.com/12666/pyu-rc0402-51-rohs-l-6-r-12666741.pdf?src-supplier=Mouser, ComponentLink4URL=https://datasheet.ciiva.com/12666/pyu-rc0402-51-rohs-l-6-r-12666741.pdf?src-supplier=Mouser, ComponentLink5Description=https://datasheet.ciiva.com/7849/1018594-7849869.pdf?src-supplier=Element14, ComponentLink5URL=https://datasheet.ciiva.com/7849/1018594-7849869.pdf?src-supplier=Element14, ComponentLink6Description=https://datasheet.ciiva.com/7849/1018594-7849871.pdf?src-supplier=Element14, ComponentLink6URL=https://datasheet.ciiva.com/7849/1018594-7849871.pdf?src-supplier=Element14, ComponentLink7Description=https://datasheet.ciiva.com/17063/pyu-rc0402-51-rohs-l-6-r-17063193.pdf?src-supplier=Future+Electronics, ComponentLink7URL=https://datasheet.ciiva.com/17063/pyu-rc0402-51-rohs-l-6-r-17063193.pdf?src-supplier=Future+Electronics, Construction=Rectangular, Depth=0.5mm, Features="Moisture Resistant", Height=0.32mm, Lead Free=5697LeadFree, Length=1mm, Manufacturer Part Number=RC0402FR-071KL, Military Standard=Not, Number of Terminations=2, Packaging="Tape and Reel", Pins=2, Pricing="1=0.1, 10=0.007, 100=0.0061, 1000=0.0051, 2500=0.00408 (USD)", Reach SVHC Compliant=No, RoHS=Yes, RoHS Compliant=Yes, Series=RC, Stock=1169696, Supplier=Digikey, Technology="THICK FILM", Termination=SMD/SMT, Tolerance=1%, Voltage Rating (AC)=50V, Voltage Rating (DC)=50V, Width=0.5mm
R8 R10 R20 R21: library part RC0402FR-0727RL, "RES 27 OHM 1% 1/16W 0402", Case Code (Imperial)=0402, Case Code (Metric)=1005, LCSC Part Number=C138021, Manufacturer=Yageo, Max Operating Temperature=155°C, Max Power Dissipation=63mW, Min Operating Temperature=-55°C, Power Rating=62.5mW, Resistance Tolerance=1%, Resistor Type="Thick Film", Supplier Part Number=YAG3086CT-ND, Temperature Coefficient=100ppm/°C, Voltage Rating=50V, Case/Package=0402, Category="Chip SMD Resistors", ComponentLink1Description=https://datasheet.ciiva.com/11808/0900766b80c66297-11808450.pdf?src-supplier=Rs, ComponentLink1URL=https://datasheet.ciiva.com/11808/0900766b80c66297-11808450.pdf?src-supplier=Rs, ComponentLink2Description=https://datasheet.ciiva.com/17044/pyu-rc0402-51-rohs-l-6-17044345.pdf?src-supplier=Future+Electronics, ComponentLink2URL=https://datasheet.ciiva.com/17044/pyu-rc0402-51-rohs-l-6-17044345.pdf?src-supplier=Future+Electronics, ComponentLink3Description=https://datasheet.ciiva.com/7849/1018594-7849927.pdf?src-supplier=Element14, ComponentLink3URL=https://datasheet.ciiva.com/7849/1018594-7849927.pdf?src-supplier=Element14, ComponentLink4Description=https://datasheet.ciiva.com/7849/1018594-7849926.pdf?src-supplier=Element14, ComponentLink4URL=https://datasheet.ciiva.com/7849/1018594-7849926.pdf?src-supplier=Element14, ComponentLink5Description=https://datasheet.ciiva.com/15189/getdatasheetpartid-327852-15189402.pdf?src-supplier=Verical, ComponentLink5URL=https://datasheet.ciiva.com/15189/getdatasheetpartid-327852-15189402.pdf?src-supplier=Verical, Construction=Rectangular, Depth=0.5mm, Features="Moisture Resistant", Height=0.016inch, Lead Free="Lead Free", Length=1mm, Manufacturer Part Number=RC0402FR-0727RL, Military Standard=Not, Number of Terminations=2, Packaging="Tape and Reel", Pricing="1=0.1, 10=0.007, 100=0.0061, 1000=0.00408, 2500=0.00357 (USD)", Reach SVHC Compliant=Unknown, RoHS=Yes, RoHS Compliant=Yes, Series=RC, Stock=193120, Supplier=Digikey, Technology="THICK FILM", Termination=SMD/SMT, Tolerance=1%, Voltage Rating (AC)=50V, Weight=2.3E-05oz, Width=0.5mm
R12 R13 R14 R15: library part AC0402FR-075K1L, "RES SMD 5.1K OHM 1% 1/16W 0402", Case Code (Imperial)=0402, Case Code (Metric)=1005, LCSC Part Number=C144745, Manufacturer=Yageo, Max Operating Temperature=155°C, Max Power Dissipation=63mW, Min Operating Temperature=-55°C, Supplier Part Number=YAG3503CT-ND, Temperature Coefficient=100ppm/°C, Tolerance=1%, Voltage Rating=50V, Case/Package=0402, Category="Chip SMD Resistors", ComponentLink1Description=https://datasheet.octopart.com/AC0402FR-075K1L-Yageo-datasheet-166720450.pdf?src-supplier=Future+Electronics, ComponentLink1URL=https://datasheet.octopart.com/AC0402FR-075K1L-Yageo-datasheet-166720450.pdf?src-supplier=Future+Electronics, ComponentLink2Description=http://www.yageo.com/NewPortal/yageodocoutput?fileName=/pdf/R-Chip/PYu-AC_51_RoHS_L_6.pdf&src-supplier=Digikey, ComponentLink2URL=http://www.yageo.com/NewPortal/yageodocoutput?fileName=/pdf/R-Chip/PYu-AC_51_RoHS_L_6.pdf&src-supplier=Digikey, ComponentLink3Description=http://www.yageo.com/documents/recent/PYu-AC_51_RoHS_L_2_revised.pdf?src-supplier=Future+Electronics, ComponentLink3URL=http://www.yageo.com/documents/recent/PYu-AC_51_RoHS_L_2_revised.pdf?src-supplier=Future+Electronics, Features="Moisture Resistant,Automotive AEC-Q200", Height=0.015inch, Lead Free=5697LeadFree, Length=0.039inch, Manufacturer Part Number=AC0402FR-075K1L, Mounting Technology="Surface Mount", Number of Terminations=2, Packaging="Cut Tape", Power Rating=63mW, Pricing="1=0.1, 10=0.009, 100=0.0071, 1000=0.00612, 2500=0.0051, 5000=0.00407 (USD)", RoHS=Yes, RoHS Compliant=Yes, Series=AC, Stock=65079, Supplier=Digikey, Width=0.02inch
SW1 SW2: "SWITCH TACTILE SPST-NO 0.05A 12V", Contact Current Rating=50mA, Contact Resistance=100mR, LCSC Part Number=C221869, Manufacturer="ITT C&K", Supplier Part Number=CKN9085CT-ND, Category="Tactile Switches", ComponentLink1Description=https://datasheet.ciiva.com/29903/getdatasheetpartid-773702-29903807.pdf?src-supplier=Verical, ComponentLink1URL=https://datasheet.ciiva.com/29903/getdatasheetpartid-773702-29903807.pdf?src-supplier=Verical, ComponentLink2Description=https://datasheet.ciiva.com/14920/pts645-14920741.pdf?src-supplier=Digikey, ComponentLink2URL=https://datasheet.ciiva.com/14920/pts645-14920741.pdf?src-supplier=Digikey, ComponentLink3Description=https://datasheet.ciiva.com/22637/1707731-22637356.pdf?src-supplier=Element14, ComponentLink3URL=https://datasheet.ciiva.com/22637/1707731-22637356.pdf?src-supplier=Element14, Lead Free=5697LeadFree, Manufacturer Part Number=PTS645SH50SMTR92LFS, Number of Positions=2NUMBER, Pricing="1=0.35, 10=0.3, 25=0.2804, 100=0.251, 250=0.23256, 500=0.21948 (USD)", RoHS=Yes, Stock=19612, Supplier=Digikey
U1: "SMD module, ESP32-S3FN8, 8 MB SPI flash, PCB antenna", LCSC Part Number=C2913206, Manufacturer="Espressif Systems", Supplier Part Number=5407-ESP32-S3-MINI-1-N8CT-ND, Category=LDO, ComponentLink1Description=https://datasheet.octopart.com/ESP32-S3-MINI-1-N8-Espressif-Systems-datasheet-165560562.pdf?src-supplier=TME, ComponentLink1URL=https://datasheet.octopart.com/ESP32-S3-MINI-1-N8-Espressif-Systems-datasheet-165560562.pdf?src-supplier=TME, Manufacturer Part Number=ESP32-S3-MINI-1-N8, Pricing="1=5.28, 10=4.566, 25=4.3196, 100=3.9802, 250=3.7768 (USD)", RoHS=No, Supplier=Digikey
U2: "IC USB SERIAL FULL UART 20QFN", LCSC Part Number=C132159, Manufacturer=FTDI, Supplier Part Number=768-1128-1-ND, Category="Interface ICs", ComponentLink1Description=https://datasheet.ciiva.com/4787/ds-ft231x-13571-4787570.pdf?src-supplier=Mouser, ComponentLink1URL=https://datasheet.ciiva.com/4787/ds-ft231x-13571-4787570.pdf?src-supplier=Mouser, ComponentLink2Description=https://datasheet.ciiva.com/30475/0900766b811020d3-30475405.pdf?src-supplier=Rs, ComponentLink2URL=https://datasheet.ciiva.com/30475/0900766b811020d3-30475405.pdf?src-supplier=Rs, ComponentLink3Description=https://datasheet.ciiva.com/1787/ds-ft231x-1787312.pdf?src-supplier=Digikey, ComponentLink3URL=https://datasheet.ciiva.com/1787/ds-ft231x-1787312.pdf?src-supplier=Digikey, ComponentLink4Description=https://datasheet.ciiva.com/1787/ft-x-series-1787313.pdf?src-supplier=Digikey, ComponentLink4URL=https://datasheet.ciiva.com/1787/ft-x-series-1787313.pdf?src-supplier=Digikey, ComponentLink5Description=https://datasheet.ciiva.com/1787/ft-x-series-1787314.pdf?src-supplier=Digikey, ComponentLink5URL=https://datasheet.ciiva.com/1787/ft-x-series-1787314.pdf?src-supplier=Digikey, Height=800um, Lead Free=5697LeadFree, Manufacturer Part Number=FT231XQ-R, Pricing="1=2.34, 25=2.27, 100=2.2, 250=2, 500=1.82002, 1000=1.7625 (USD)", RoHS=Yes, Stock=29036, Supplier=Digikey
U3: "IC REG LIN 3.3V 1.5A SOT-223-4", LCSC Part Number=C181262, Manufacturer="Texas Instruments", Supplier Part Number=296-24897-1-ND, Category="Voltage Regulators - Linear", ComponentLink1Description=https://datasheet.ciiva.com/2046/-2046068.pdf?src-supplier=Digikey, ComponentLink1URL=https://datasheet.ciiva.com/2046/-2046068.pdf?src-supplier=Digikey, Lead Free=5697LeadFree, Manufacturer Part Number=TL1963A-33DCYR, Pricing="1=2.77, 10=2.069, 25=1.8936, 100=1.7, 250=1.60772, 500=1.55212, 1000=1.50634 (USD)", RoHS=Yes, Stock=589, Supplier=Digikey, Thickness=1.6mm

## Via types
v1: diameter 24, hole 12, L1 to L4, tented both sides, 152 vias
v2: diameter 24/24/24 (per signal layer), hole 12, L1 to L4, tented both sides, 11 vias

## Nets (pads, with @x,y where several pads share a name; then routed paths per layer and width w, separated by ;. In a path a pad name is that pad's centre, name@x,y a point inside that pad or via, vN(x,y) a via of type N, cw(c..) or ccw(c..) an arc to the next point about the centre after c; other vN are vias at no path point)
+3V3: C2.2 C3.2 C14.2 C15.2 J1.2 J2.1 J6.2 R3.2 R4.2 R5.2 R9.2 R22.2 U1.3 | length 4669.5
  L1 w15: R9.2 774.86,486.5 824.5,486.5 v1(825,487) ; R3.2 940.59,870 v1(970,870) ; v1(2495,895) 2495,892.56 2482.42,879.99 2482.42,848.33 2505.67,848.33 2534.79,819.21 2553.2,819.21 2561.99,810.43 2561.99,775.96 U1.3 ; C15.2 2545.34,858.66 2545.34,896.34 v1(2546,897)
  L1 w20: R22.2 1738.99,365.01 v1(1769,335) 1769.29,334.71 1824.71,334.71 R4.2 ; R5.2 1825.63,667.44 1861.58,667.44 1884.02,645 v1(1885,645) ; J1.2 2560,950 2622.08,887.92 2622.08,860.6 C14.2 ; C3.2 2630,143.43 2650,123.43 J2.1
  L1 w25: J6.2 1530.01,500 R22.2
  L2 w15: v1(2495,895) 2496,896 v1@2545,896
  L2 w20: 2546,842 2546,683 2570,659 2570,313 2597.47,285.53 2597.47,158.53 2650,106 J2.1
  L2 w35: J6.2 1462,547
  L2 w40: v1(825,487) 938.64,600.64 938.64,754.64 1004.58,820.58 1497,820.58 ; 1462,547 1497,582 1497,820.58 ; J1.2 2550,846 2546,842 2520,816 2175,816 2122,763 2122,756.04 2118.79,752.83 2118.79,718.04 2122,714.82 2122,619.89 2098.57,596.46 1947.54,596.46 1899,645 1808.74,645 1633.16,820.58 1497,820.58
+3V3_FTDI: C7.2 C8.2 R3.1 R11.1 U2.10 U2.20 | length 974.4
  L1 w10.01: 600.63,730.63 U2.10 ; U2.20 844.37,809.37
  L1 w15: C7.2@537.34,674.66 542.78,680.1 542.78,689.47 583.93,730.63 600.63,730.63 ; C7.2 540,672.68 v1(540,591) 541.97,591 576.06,556.91 R11.1 ; v1(830,855) 831.72,856.72 878.13,856.72 884.41,863 R3.1 ; 844.9,809.9 878.68,809.9 ; C8.2 878.68,809.9 ; R3.1@878.68,850.33 878.68,809.9 ; R3.1@889.41,865 R3.1@889.41,870
  L4 w40: v1(540,591) 734,591 830,687 v1(830,855)
+3V3_REG: C11.2 C12.2 J6.1 U3.3 | length 1357.7
  L1 w20: v1(515,150) C12.2 C11.2 ; C11.2@583.94,201.81 663.46,201.81 U3.3
  L2 w35: 1323.46,459 J6.1@1364.46,500
  L2 w40: v1(480,150) v1(585,150) 676,150 678,152
  L2 w60: 678,152 1232,152 1288.5,208.5 1288.5,424.04 1323.46,459
+5V: C9.2 C13.2 J1.22 J5.2 R6.2 U3.1 | length 1223.4
  L1 w12: J5.2 376.08,498.92 416.08,498.92 535.65,379.35 557.97,379.35 C13.2 662.6,377.32 U3.1
  L1 w15: J1.22 553.82,946.18 C9.2 ; v1(599,500) 601.44,500 615.44,486 R6.2
  L4 w40: J5.2 463,500 ; J1.22 550,699 463,612 463,500 ; v1(599,500) 463,500
+5V_VBUS1: C1.2 D3.2 J3.A4B9 J3.B4A9 J5.1 R1.2 | length 1519
  L1 w12: D3.2 360,618.5 404,618.5 440.18,618.5 C1.2
  L1 w15: J5.1 469,550 568,451 853,451 876.69,474.69 963.69,474.69 970.5,481.5 970.56,481.5 985.5,496.44 985.5,496.5 997,508 997,597 969,625 R1.2
  L1 w20: J3.A4B9 204.41,874.41 180,850 180,709.84 204.41,685.43 J3.B4A9 297.57,685.43 320,663 379.92,663 404,638.92 404,618.5 404,584.95 375,555.95 J5.1
+5V_VBUS2: C10.2 D6.2 J4.A4B9 J4.B4A9 J5.3 | length 665.2
  L1 w12: D6.2 391.16,370 395,366.16 ; J5.3@375.96,450 431.13,394.83 431.13,371.55 C10.2 398.84,370
  L1 w20: J4.B4A9 204.41,125.59 170,160 170,283.28 201.28,314.57 J4.A4B9 374.57,314.57 395,335 395,366.16
+VCC_FTDI: C4.2 C5.2 R6.1 R9.1 U2.12 | length 267.8
  L1 w10.01: 690,660 690.32,660.32 U2.12
  L1 w15: 690,660 670,640 670,618.79 683.79,605 C4.2 722.68,600 C5.2 722.93,544.75 722.93,486.25 R9.1
BTN_GPIO0: C17.2 Q2.3 R21.1 SW2.1 SW2.2 | length 1091.5
  L1 w6: Q2.3 1171,629.5 1165,635.5 1165,655 1180,670 1234.92,670 SW2.2 SW2.1 1611.42,661.42 1645,695 1645,720 C17.2 1705.82,729.18 1830,605 1910,605 1930,625 1930,743.33 1970.49,783.82 R21.1
CHIP_PU: C16.2 J2.3 Q1.3 R22.1 SW1.1 SW1.2 U1.45 | length 3012.9
  L1 w6: Q1.3 1175.2,687.83 1140,652.63 1140,612 1202,550 1202,239 1178,215 1178,180 1196.58,161.42 SW1.2 SW1.1 1556.5,201.5 1583.82,228.82 C16.2 R22.1 ; J2.3 2459.87,50 2580.04,170.17 2600.17,170.17 2629.29,199.29 U1.45
  L1 w12: v1(1612,350) 1615.25,350 1634.26,330.99 R22.1
  L4 w6: v1(1612,350) 1651,389 2031,389 2098,456 2216,456 2315.04,356.96 2502.5,356.96 2585.36,274.09 2585.36,255.04 2585,254.68 2585,185 J2.3
CON1_USB_N: D4.2 J3.A7 J3.B7 R10.1 | length 471.3
  L1 w6.03: J3.A7 247.72,770 275,770 280,775 280,808.47 ; J3.B7 248.61,808.47 280,808.47 ; v1(359,778) 356,778 340.01,793.99 D4.2 339.03,808.47 280,808.47 ; v1@465,738 R10.1
  L4 w6.03: v1(359,778) 359,778.74 346.15,791.6 346.15,820.33 355.89,830.08 389.92,830.08 400.97,819.03 400.97,774.03 418.01,756.99 444.01,756.99 v1(463,738)
CON1_USB_P: D5.2 J3.A6 J3.B6 R8.1 | length 543.4
  L1 w6.03: J3.A6 213.61,789.76 206,782.16 206,758 213.61,750.39 J3.B6 247.83,750.2 D5.2@338.25,750.2 ; v1@322.26,779.49 338.25,763.5 D5.2@338.25,750.2 ; D5.2@338.25,750 D5.2@338.25,750.2 ; D5.2 344.8,750.2 D5.2@338.25,750.2 ; v1(463,790) 500.99,790 R8.1
  L4 w6.03: v1(319.26,779.49) 320.01,779.49 332.12,791.6 332.12,826.15 350.08,844.11 395.73,844.11 415,824.84 415,779.84 423.83,771.01 444.01,771.01 v1(463,790)
CON2_USB_N: D7.2 J4.A7 J4.B7 R23.1 | length 1949.7
  L1 w6.03: J4.A7 211.61,210.24 204,217.84 204,242 211.61,249.61 J4.B7 248.69,248.55 343.95,248.55 D7.2 346.01,246.49 346.01,233.99 353,227 443,227 452.25,236.25 v1(473,236.25) ; v1(1812,518) 1816.86,518 1828.86,530 R23.1
  L4 w6.03: v1(473,236.25) 476.44,232.81 493.45,232.81 499,227.26 792.24,227.26 852.97,288 852.97,400.81 912.97,460.81 1421.09,460.81 1452.79,492.51 1787,492.51 1812,517.51 v1(1812,518)
CON2_USB_P: D8.2 J4.A6 J4.B6 R24.1 | length 1898
  L1 w6.03: J4.B6 247.86,190.78 344.78,190.78 D8.2 345,205 352.97,212.97 444.03,212.97 452.75,204.25 v1(473,204.25) ; J4.A6 247.81,230.1 275.53,230.1 279.99,225.63 279.99,190.86 ; v1@1817.04,453 1829.04,441 R24.1